# Altium PCB MTCH9010_Evaluation_Kit.PcbDoc (part 2 of 2)
Units mm, origin at the board's own origin, x right, y up, seen from the top; angles counter-clockwise.
Board outline 60 x 70 mm, 4 copper layers (Top Layer, Gnd Plane 1, Gnd Plane 2, Bottom Layer), stack 1.574 mm thick; 87 components, 67 nets, 337 pads, 182 vias.
Unrouted connection lines stored in the file: 1.
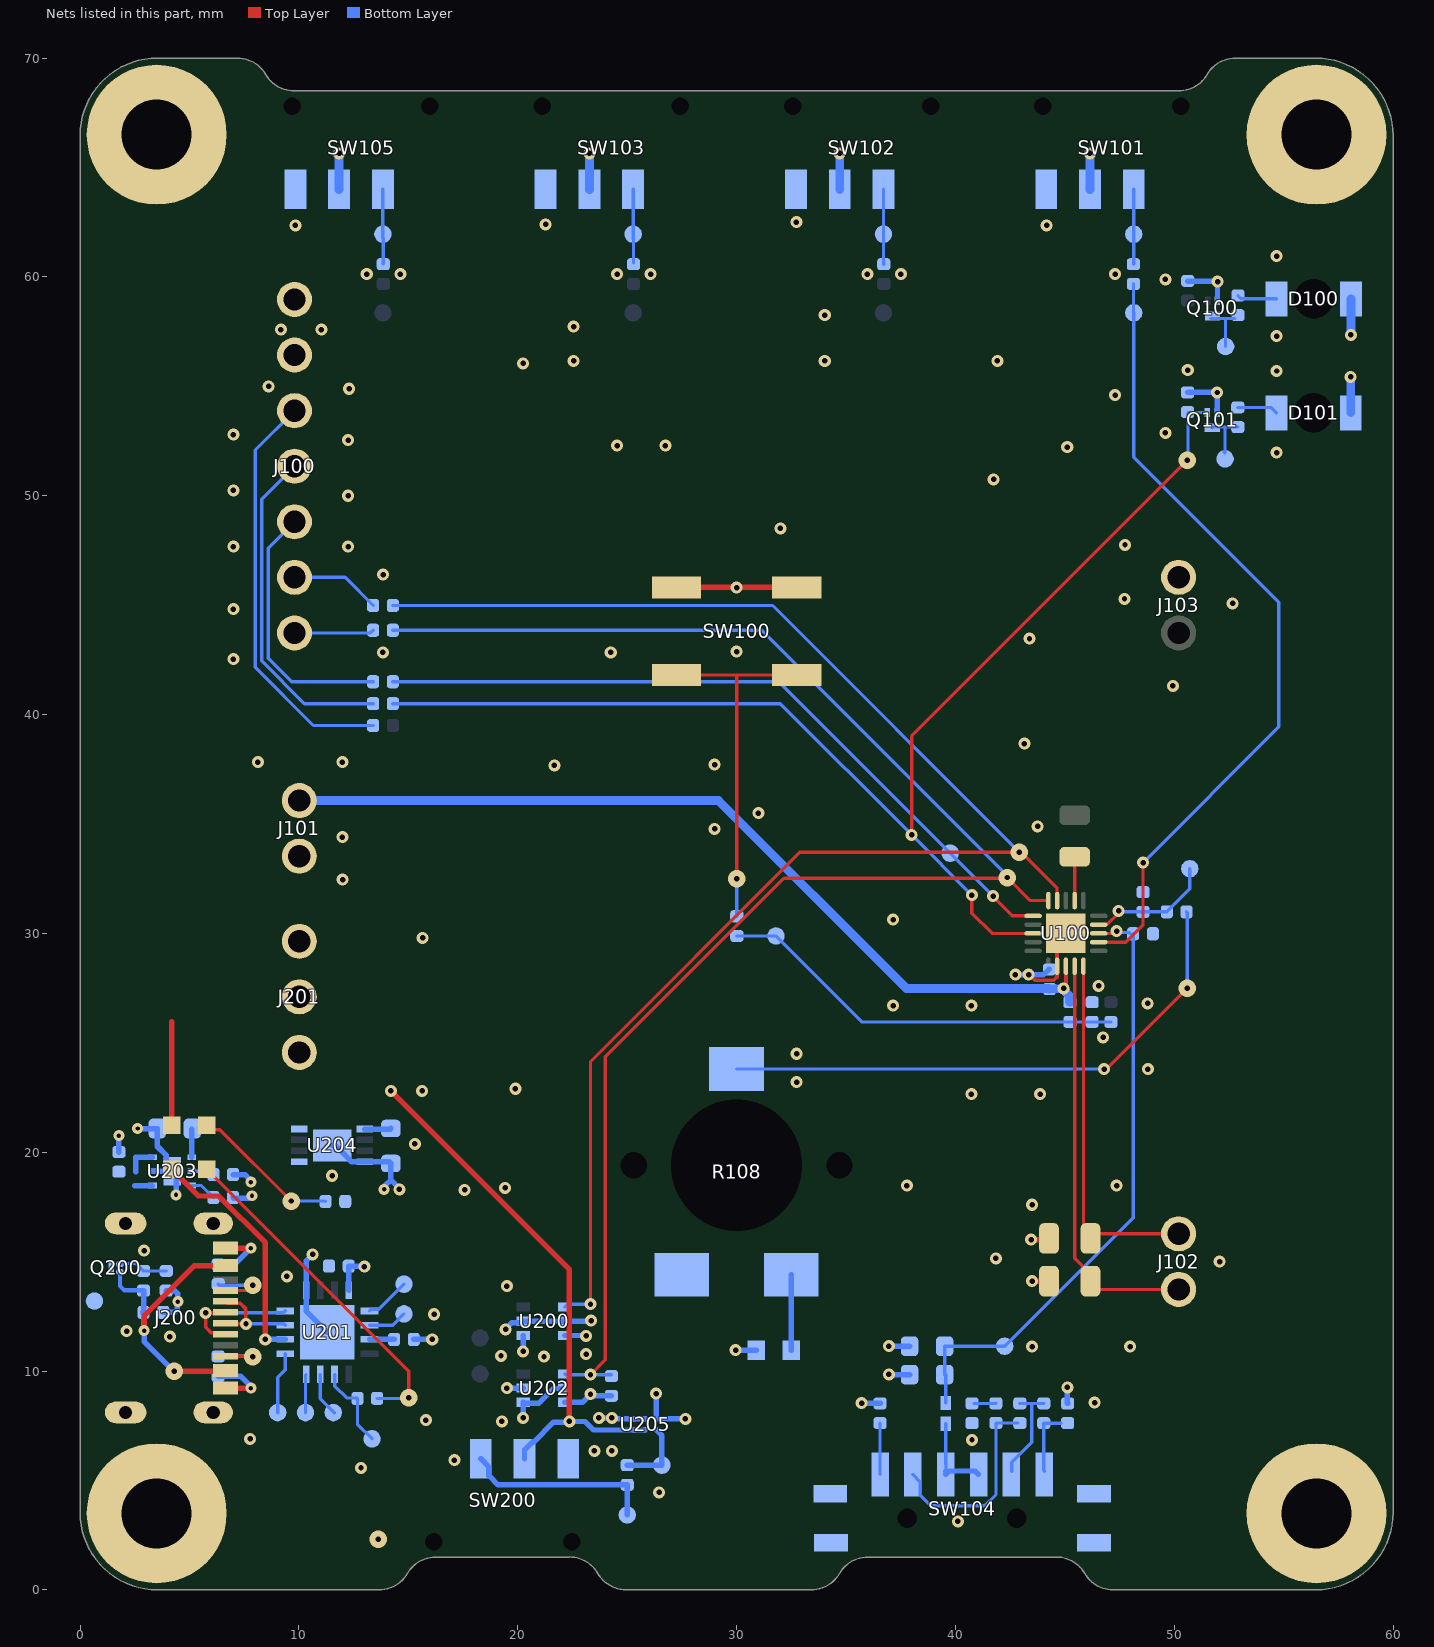
[diagram p4: the nets of this part, all layers, seen from the top]

## Via types
v1: diameter 0.55, hole 0.25, Top Layer to Bottom Layer, 159 vias
v2: diameter 0.55/0.8 (per signal layer), hole 0.25, Top Layer to Bottom Layer, 13 vias
v3: diameter 0.5, hole 0.2, Top Layer to Bottom Layer, 10 vias

## Nets (pads, with @x,y where several pads share a name; then routed paths per layer and width w, separated by ;. In a path a pad name is that pad's centre, name@x,y a point inside that pad or via, vN(x,y) a via of type N, cw(c..) or ccw(c..) an arc to the next point about the centre after c; other vN are vias at no path point) (continued)
GND: C100.2 C101.1 C102.1 C103.2 C200.2 C202.1 C203.1 C204.1 C205.1 J100.6 J103.1 J200.1 J200.2 J200.3 J200.4 J200.A1/B12 J200.B1/A12 pad.666 Q100.2 Q101.2 R103.1 R104.1 R108.3 R120.1 R123.1 R126.2 R202.2 R203.2 R204.1 R205.1 R206.2 R207.2 SW100.1 SW100.2 SW101.3 SW102.3 SW103.3 SW104.7 SW105.3 SW200.3 U100.17 U100.21 U200.2 U200.5 U201.13 U201.17 U202.2 U203.5 U203.7 U204.4 U204.9 U205.C1 | length 49
  Top Layer w0.18: v1(43.35,28.115) 43.385,28.115 43.64,27.86 44.495,27.86 44.65,28.015 44.65,29.6 U100.21@45.05,30
  Top Layer w0.25: J200.B1/A12@6.657,9.22 v3(7.8,9.22) ; J200.A1/B12@6.657,15.62 v3(7.8,15.62) ; SW100.1@27.25,45.809 29.991,45.809 v1(30,45.8) 30.009,45.809 SW100.2@32.75,45.809
  Bottom Layer w0.24: v1(26.325,8.971) 26.333,8.963 U205.C1@26.333,7.818 v1(27.662,7.818) ; Q101.2@51.964,53.901 v1(51.964,54.718) ; Q100.2@51.978,58.972 v1(51.978,59.789)
  Bottom Layer w0.25: C204.1@1.773,20.009 v3(1.773,20.759) ; v3(2.63,21.082) C202.1@3.526,21.082 3.526,20.273 3.929,19.87 3.929,19.401 U203.7@4.204,19.126 ; U203.5@3.304,19.126 U203.7@4.204,19.126 ; R206.2@3.8,12.683 4.322,12.683 4.447,12.808 4.447,13.148 v3(4.469,13.17) 4.456,13.183 4.456,13.541 4.322,13.675 R207.2@3.937,13.675 ; v3(4.383,18.05) 4.383,18.947 U203.7@4.204,19.126 ; R202.2@6.311,9.77 7.328,9.77 7.675,9.423 7.675,9.413 7.8,9.288 v3(7.8,9.22) ; R203.2@6.311,14.87 7.05,14.87 v3(7.8,15.62) ; R205.1@6.99,17.933 7.023,17.9 7.677,17.9 7.787,18.01 v3(7.855,18.01) ; C205.1@6.99,18.982 7.001,18.972 7.538,18.972 7.752,18.758 7.752,18.682 v3(7.8,18.634) ; v1(10.626,15.33) 10.621,15.33 10.325,15.034 U201.13@10.325,13.695 10.325,12.745 10.65,12.42 U201.17@11.3,11.77 ; U204.9@11.517,20.311 11.667,20.311 12.267,19.711 12.267,19.707 12.413,19.561 U204.4@13.017,19.561 14.125,19.561 C203.1@14.2,19.486 14.2,18.734 ; v3(13.891,18.3) 13.939,18.348 13.939,18.473 14.2,18.734 ; v1(14.591,18.3) 14.591,18.342 14.2,18.734 ; v1(19.45,11.902) 19.45,11.915 19.746,12.212 20.179,12.212 20.25,12.283 23.326,12.283 v1(23.35,12.307) ; v1(19.5,9.22) U202.2@20.25,9.22 ; v1@35.713,8.521 R126.2@36.556,8.521 ; v1(36.956,9.845) 36.967,9.834 R120.1@37.908,9.834 ; v1(42.736,28.113) 42.738,28.114 v1(43.35,28.115) v1(43.35,28.115) 44.024,28.115 44.268,28.36 C100.2@44.3,28.36 ; R104.1@50.611,54.722 51.959,54.722 v1(51.964,54.718) ; R103.1@50.625,59.794 v1@51.974,59.794
  other v1: 40.116,3.133 26.458,4.457 12.837,5.571 17.1,5.925 23.504,6.349 24.3,6.349 40.758,6.857 7.769,6.904 19.275,7.701 15.8,7.757 35.713,8.532 46.364,8.557 21.2,10.661 19.235,10.69 23.121,10.775 43.51,11.113 47.987,11.113 4.1,11.574 2.129,11.829 16.173,12.595 19.5,13.878 9.451,14.33 52.077,15 41.851,15.15 2.926,15.504 43.51,17.6 17.575,18.279 19.421,18.376 37.781,18.473 47.368,18.473 11.517,18.925 15.297,20.386 40.727,22.66 43.873,22.66 15.627,22.803 19.892,22.9 32.743,23.2 48.791,23.8 32.743,24.5 46.75,25.25 37.156,26.7 40.727,26.7 48.782,26.8 46.55,27.598 15.65,29.793 37.156,30.632 12,32.462 11.985,34.4 28.996,34.774 43.76,34.893 31,35.497 21.675,37.679 28.996,37.716 8.127,37.829 11.985,37.829 43.152,38.668 49.936,41.309 7,42.534 13.837,42.842 24.25,42.842 30,42.879 43.387,43.469 7,44.823 52.671,45.084 47.727,45.292 13.852,46.394 7,47.671 12.25,47.671 47.75,47.75 32.002,48.509 12.25,50 7,50.25 41.75,50.75 54.676,51.972 45.111,52.227 24.537,52.289 26.75,52.289 12.25,52.54 7,52.79 49.591,52.871 47.3,54.595 12.298,54.89 8.617,55 54.676,55.7 50.618,55.737 20.25,56.047 22.554,56.166 34.03,56.166 41.921,56.166 54.676,57.296 9.177,57.593 11.027,57.593 22.554,57.728 34.03,58.25 49.591,59.888 13.099,60.132 14.637,60.132 24.537,60.132 26.074,60.132 35.974,60.132 37.512,60.132 47.3,60.132 54.676,60.948 9.837,62.352 44.166,62.352 21.275,62.4 32.729,62.5
HEARTBEAT: Q101.1 R104.2 R128.2 U100.13 | length 59.2
  Top Layer w0.15: v1(38,34.5) 38,39.025 v2(50.602,51.628) ; v1(40.75,31.748) 40.75,30.925 41.675,30 U100.13@43.55,30
  Bottom Layer w0.15: R128.2@14.292,40.5 32,40.5 v1(38,34.5) 38,34.498 v1(40.75,31.748) ; v2@50.629,51.914 50.629,53.804 Q101.1@51.514,53.804
MTCH9010_RX: R107.2 R124.1 U100.10 U202.4 | length 73.8
  Top Layer w0.15: v1(23.325,9.834) 24,10.509 24,24.36 32.165,32.525 42.346,32.525 v2(42.375,32.554) 43.429,31.5 U100.10@44.25,31.5
  Bottom Layer w0.15: R107.2@14.292,43.854 31.146,43.854 42.375,32.625 v2(42.375,32.554) ; U202.4@22.15,9.87 22.186,9.834 v1(23.325,9.834) R124.1@24.282,9.834
MTCH9010_TX: R106.2 U100.9 U200.4 | length 72.3
  Top Layer w0.15: v1(23.325,13.06) 23.325,24.144 32.886,33.705 43.016,33.705 44.64,32.08 44.64,31.51 U100.9@44.65,31.5
  Bottom Layer w0.15: R106.2@14.292,44.985 31.644,44.985 v2(42.924,33.705) v2@42.924,33.826 ; U200.4@22.15,12.925 22.275,13.05 v1@23.315,13.05
NetC201_1: C201.1 Q200.1 R207.1 | length 2.2
  Bottom Layer w0.15: Q200.1@1.846,14.912 2.554,14.912 C201.1@2.892,14.575 ; C201.1@2.9,14.575 3.363,14.575 R207.1@3.937,14.575
NetC205_2: C205.2 U203.2 | length 1
  Bottom Layer w0.15: U203.2@5.104,19.126 5.947,19.126 C205.2@6.09,18.982
NetD100_2: D100.2 R100.2 | length 1.8
  Bottom Layer w0.15: R100.2@52.913,59.15 53.063,59 D100.2@54.673,59
NetD101_2: D101.2 R101.2 | length 1.9
  Bottom Layer w0.15: R101.2@52.906,54.038 54.416,54.038 D101.2@54.666,53.788
NetD200_2: D200.2 R201.1 | length 15.7
  Top Layer w0.15: D200.2@5.778,19.226 6.103,18.901 15.015,9.989 v2(15.015,8.78)
  Bottom Layer w0.15: R201.1@13.575,8.75 14.985,8.75 v2(15.015,8.78)
NetD201_2: D201.2 R204.2 | length 6.9
  Top Layer w0.15: D201.2@5.778,21.226 5.971,21.033 6.379,21.033 v2(9.642,17.77)
  Bottom Layer w0.15: v2(9.642,17.77) 11.196,17.77 R204.2@11.217,17.75
NetJ100_1: J100.1 R107.1 | length 3.7
  Bottom Layer w0.15: J100.1@9.8,43.73 13.268,43.73 R107.1@13.392,43.854 ; J100.1@10.096,43.466 J100.1@10.134,43.428
NetJ100_2: J100.2 R106.1 | length 4.1
  Bottom Layer w0.15: J100.2@9.8,46.27 12.107,46.27 R106.1@13.392,44.985
NetJ100_3: J100.3 R129.1 | length 12
  Bottom Layer w0.15: J100.3@9.8,48.81 8.6,47.61 8.6,42.574 9.674,41.5 R129.1@13.392,41.5
NetJ100_4: J100.4 R128.1 | length 15.4
  Bottom Layer w0.15: J100.4@9.8,51.35 8.3,49.85 8.3,42.45 10.25,40.5 R128.1@13.392,40.5
NetJ100_5: J100.5 R127.1 | length 19
  Bottom Layer w0.15: J100.5@9.8,53.89 8,52.09 8,42.163 10.662,39.5 R127.1@13.391,39.5
NetJ104_2: J104.2 SW104.3 SW104.4 | length 3.8
  Bottom Layer w0.15: SW104.4@39.558,5.76 J104.2@39.558,7.596 ; SW104.4@39.569,5.422 SW104.4@39.569,5.76
  Bottom Layer w0.25: SW104.4@39.556,5.276 39.712,5.433 40.899,5.433 SW104.3@41.056,5.276 ; SW104.4@39.558,5.422 SW104.4@39.569,5.422
NetJ105_1: J105.1 R108.1 | length 3.4
  Bottom Layer w0.25: J105.1@32.5,10.954 R108.1@32.5,14.403
NetJ200_A5: J200.A5 R203.1 | length 3
  Top Layer w0.15: J200.A5@6.647,13.68 7.594,13.68 7.838,13.925 v2(7.881,13.925)
  Bottom Layer w0.15: R203.1@6.311,13.97 6.356,13.925 v2(7.881,13.925) ; v2@7.836,13.67 v2@7.881,13.625
NetJ200_B5: J200.B5 R202.1 | length 2.7
  Top Layer w0.15: J200.B5@6.657,10.67 v2@7.8,10.67
  Bottom Layer w0.15: R202.1@6.311,10.69 v2@7.836,10.69
  other v2: 7.881,10.645
NetQ100_3: pad.5@52.348,56.819 Q100.3 R100.1 | length 2.4
  Bottom Layer w0.15: Q100.3@51.673,58.1 R100.1@52.773,58.1 ; pad.5@52.346,56.819 52.346,58.089
NetQ101_3: pad.5@52.324,51.688 Q101.3 R101.1 | length 2.4
  Bottom Layer w0.15: Q101.3@51.739,53.104 51.772,53.138 52.324,53.138 ; pad.5@52.309,51.963 52.29,51.982 52.29,52.013 52.324,52.046 52.324,53.138 ; R101.1@52.906,53.138 52.324,53.138
NetR105_2: pad.5@48.15,61.952 R105.2 SW101.1 | length 3.4
  Bottom Layer w0.15: R105.2@48.135,60.582 48.15,60.597 pad.5@48.15,61.952 SW101.1@48.15,64
NetR108_2: R108.2 R109.2 | length 25.6
  Top Layer w0.15: v1(46.8,23.8) 46.9,23.8 50.588,27.488 v2(50.6,27.488)
  Bottom Layer w0.15: R108.2@30,23.803 46.797,23.803 v1(46.8,23.8) ; R109.2@50.56,30.985 50.6,30.945 v2(50.6,27.488)
NetR110_2: R110.2 SW100.3 SW100.4 | length 16.5
  Top Layer w0.15: SW100.3@27.25,41.809 30.009,41.809 ; v2@30.009,32.49 30.009,41.809 ; SW100.4@32.75,41.809 30.009,41.809
  Bottom Layer w0.15: R110.2@30.01,30.783 v2(30.01,32.49)
NetR114_2: pad.5@36.712,61.952 R114.2 SW102.1 | length 3.4
  Bottom Layer w0.15: pad.5@36.712,61.586 36.712,60.647 36.727,60.632 R114.2@36.727,60.582 ; pad.5@36.712,61.586 SW102.1@36.712,64
NetR116_2: pad.5@25.274,61.952 R116.2 SW103.1 | length 3.4
  Bottom Layer w0.15: pad.5@25.274,61.724 25.29,61.709 R116.2@25.29,60.632 ; pad.5@25.275,61.725 SW103.1@25.275,64
NetR121_1: R121.1 R123.2 | length 1
  Bottom Layer w0.15: R123.2@40.858,8.521 41.855,8.521 R121.1@41.858,8.524
NetR122_2: pad.5@13.837,61.952 R122.2 SW105.1 | length 3.4
  Bottom Layer w0.15: SW105.1@13.837,64 pad.5@13.837,61.952 13.837,61.786 13.852,61.77 R122.2@13.852,60.6
NetR126_1: R126.1 SW104.6 | length 2.3
  Bottom Layer w0.15: SW104.6@36.556,5.276 R126.1@36.556,7.621
NetR200_1: R200.1 U201.3 | length 1.1
  Bottom Layer w0.25: U201.3@13.225,11.445 R200.1@14.35,11.445
NetR201_2: pad.5@13.34,6.904 R201.2 U201.6 | length 3.9
  Bottom Layer w0.15: U201.6@11.625,9.845 11.638,9.832 11.638,9.308 12.175,8.771 12.654,8.771 R201.2@12.675,8.75 12.675,7.57 pad.5@13.34,6.904
NetR205_2: R205.2 U203.3 | length 1.2
  Bottom Layer w0.15: U203.3@5.104,18.476 5.547,18.476 R205.2@6.09,17.933
NetR208_1: pad.5@25.004,3.425 R208.1 SW200.1 | length 8.8
  Bottom Layer w0.25: SW200.1@18.309,5.993 18.684,5.618 18.684,5.216 19.1,4.8 R208.1@25.004,4.8 pad.5@25.004,3.425
NetR208_2: pad.5@26.584,5.7 R208.2 U205.C2 | length 3.3
  Bottom Layer w0.24: R208.2@25.004,5.7 pad.5@26.584,5.7 26.584,7.058 U205.C2@26.333,7.31
NetTP200_1: TP200.1 U201.8 | length 1.8
  Bottom Layer w0.15: TP200.1@10.3,8.1 10.3,9.82 U201.8@10.325,9.845
NetTP201_1: TP201.1 U201.9 | length 2.8
  Bottom Layer w0.15: TP201.1@9.03,8.1 9.03,9.709 9.375,10.054 U201.9@9.375,10.795
NetTP202_1: TP202.1 U201.1 | length 2.1
  Bottom Layer w0.15: U201.1@13.225,12.745 13.3,12.82 13.65,12.82 TP202.1@14.8,13.97
NetTP203_1: TP203.1 U201.2 | length 1.8
  Bottom Layer w0.15: U201.2@13.225,12.095 14.283,12.095 TP203.1@14.8,12.612
NetTP204_1: TP204.1 U201.7 | length 2
  Bottom Layer w0.15: U201.7@10.975,9.845 10.975,8.742 TP204.1@11.617,8.1
OPERATION_MODE: pad.5@48.15,58.362 R105.1 U100.2 | length 37
  Top Layer w0.15: U100.2@46.55,29.6 47.783,29.6 48.575,30.392 v1(48.575,33.233)
  Bottom Layer w0.15: pad.5@48.135,58.362 R105.1@48.135,59.682 ; pad.5@48.15,58.362 48.15,51.768 54.777,45.141 54.777,39.435 v1(48.575,33.233)
RESET: C103.1 pad.5@31.796,29.883 R102.2 R110.1 R125.1 | length 18.7
  Bottom Layer w0.15: R110.1@30.01,29.883 pad.5@31.796,29.883 35.724,25.955 R125.1@45.231,25.955 C103.1@46.25,25.955 R102.2@47.106,25.955
SENSE_CAP: R113.1 U100.7 | length 1.9
  Top Layer w0.15: U100.7@45.45,31.5 R113.1@45.45,33.45
SENSE_CON1: J102.1 R111.1 U100.20 | length 16.7
  Top Layer w0.15: U100.20@45.85,28.5 45.85,16.717 46.175,16.392 R111.1@46.175,16.061 46.384,16.27 J102.1@50.2,16.27
SENSE_CON2: J102.2 R112.1 U100.19 | length 19.4
  Top Layer w0.15: U100.19@45.45,28.5 45.45,15.15 46.175,14.425 R112.1@46.175,14.107 ; J102.2@50.2,13.73 R112.1@46.539,13.73 ; R112.1@46.175,14.094 R112.1@46.175,14.107 ; R112.1@46.175,14.094 R112.1@46.539,13.73 ; R112.1@46.175,14.094 R112.1@46.539,13.73 ; R112.1@46.175,14.094 R112.1@46.175,14.107
SLEEP_2S: R119.2 R121.2 SW104.5 | length 9.2
  Bottom Layer w0.15: SW104.5@38.056,5.276 38.381,4.951 38.381,4.343 38.883,3.84 41.338,3.84 41.855,4.357 41.855,7.621 R119.2@42.858,7.621
SLEEP_16S: R117.2 R119.1 SW104.2 | length 4.6
  Bottom Layer w0.15: SW104.2@42.569,5.422 42.569,5.822 43.489,6.742 43.489,8.521 ; R119.1@42.943,8.521 43.489,8.521 ; R117.2@44.036,8.521 43.489,8.521
SLEEP_128S: R115.1 R117.1 SW104.1 | length 3
  Bottom Layer w0.15: SW104.1@44.069,5.422 44.036,5.455 R117.1@44.036,7.621 R115.1@44.829,7.621
SLEEP_CONFIG: C102.2 J104.1 pad.5@42.252,11.134 R118.1 R120.2 U100.3 | length 28.1
  Top Layer w0.15: U100.3@46.55,30 47.16,30 47.26,30.1 v1(47.368,30.1)
  Bottom Layer w0.15: R120.2@39.508,9.834 R118.1@39.508,11.134 pad.5@42.252,11.134 48.125,17.007 C102.2@48.125,29.985 ; J104.1@39.558,8.546 R120.2@39.558,9.834 ; v1(47.368,30.1) 47.425,30.043 47.93,30.043 47.975,29.997 C102.2@47.975,29.985
THRESHOLD: C101.2 pad.5@50.71,32.955 R109.1 U100.4 | length 5.9
  Top Layer w0.15: U100.4@46.55,30.4 46.56,30.41 46.94,30.41 47.463,30.933 v1(47.463,31.028)
  Bottom Layer w0.15: v1(47.463,31.028) 47.506,30.985 R109.1@49.66,30.985 50.71,32.035 pad.5@50.71,32.969
USB_N: J200.A7 J200.B7 U201.11 | length 4.5
  Top Layer w0.16: J200.A7@6.657,12.17 6.665,12.162 7.573,12.162 v1(7.581,12.154) ; J200.B7@6.657,13.17 6.727,13.1 7.315,13.1 7.581,12.834 7.581,12.181 v1@7.575,12.176
  Bottom Layer w0.16: v1(7.581,12.154) 9.316,12.154 U201.11@9.375,12.095
USB_P: J200.A6 J200.B6 U201.12 | length 6.3
  Top Layer w0.16: J200.B6@6.657,11.67 6.587,11.74 6,11.74 5.734,12.006 v1(5.734,12.659) 5.739,12.664 6.652,12.664 J200.A6@6.657,12.67
  Bottom Layer w0.16: v1(5.734,12.659) 9.289,12.659 U201.12@9.375,12.745
VBUS: C201.2 J200.A4/B9 J200.B4/A9 Q200.2 R206.1 | length 13.8
  Top Layer w0.25: v3@2.926,11.82 v3(2.926,11.85) 2.926,12.521 5.225,14.82 J200.A4/B9@6.657,14.82 ; v2@4.268,10 6.637,10 J200.B4/A9@6.657,10.02
  Bottom Layer w0.2: Q200.2@1.821,14.475 1.821,13.888 2.024,13.686 2.889,13.686 C201.2@2.9,13.675
  Bottom Layer w0.25: R206.1@2.854,12.683 2.926,12.612 v3(2.926,11.85) 2.926,11.343 v2@4.268,10 ; R206.1@2.9,12.683 C201.2@2.9,13.675
  other v2: 4.3,10
VBUS_DELAYED: C204.2 pad.5@0.655,13.2 Q200.3 U203.4 U203.6 | length 2.2
  Bottom Layer w0.25: 2.494,18.476 U203.4@3.304,18.476 ; 2.547,19.097 2.547,19.776 U203.6@3.304,19.776
VCC_BRIDGE: C200.1 D200.1 R200.2 U200.1 U201.10 U201.16 U202.1 U202.5 U205.A1 U205.B1 | length 19.5
  Top Layer w0.25: D200.1@4.178,19.226 5.404,18 6.328,18 8.461,15.867 v1(8.461,11.445)
  Bottom Layer w0.24: v1(23.709,7.86) v1(24.3,7.86) ; v1@24.3,7.843 24.325,7.818 U205.A1@25.317,7.818 U205.B1@25.825,7.818
  Bottom Layer w0.25: v1(8.461,11.445) U201.10@9.375,11.445 ; U201.16@12.275,13.695 C200.1@12.275,14.795 12.285,14.785 12.984,14.785 v1(12.994,14.776) ; R200.2@15.25,11.445 v1(16.093,11.445) ; v1(20.25,7.857) U202.1@20.25,8.57 20.295,8.525 20.95,8.525 21.627,9.202 22.132,9.202 U202.5@22.15,9.22 ; v1(20.25,10.9) U200.1@20.25,11.625
  other v2: 13.632,2.318
VCC_MTCH9010: C100.1 J101.1 R125.2 U100.18 | length 40.1
  Top Layer w0.18: v1@45.05,27.688 U100.18@45.05,28.5
  Bottom Layer w0.4: J101.1@10.017,36.07 29.17,36.07 37.752,27.488 44.272,27.488 C100.1@44.3,27.46 44.314,27.474 44.936,27.474 v1(44.95,27.488) 44.95,27.447 45.025,27.372 45.025,27.331 45.2,27.156 45.2,26.886 R125.2@45.231,26.855
VCC_P3V3: C203.2 J201.1 SW200.2 U204.1 U205.A2 U205.B2 | length 26.3
  Top Layer w0.25: v1(14.2,22.8) 22.36,14.64 v1(22.358,7.7) v1(22.358,7.7)
  Bottom Layer w0.24: v1(22.358,7.7) 23.069,7.7 23.459,7.31 U205.A2@25.317,7.31 U205.B2@25.825,7.31
  Bottom Layer w0.25: U204.1@13.017,21.061 14.175,21.061 C203.2@14.2,21.086 ; SW200.2@20.309,5.993 20.309,6.393 20.684,6.768 20.744,6.768 21.637,7.662 22.32,7.662 v1(22.358,7.7)
VCC_P5V0: C202.2 J201.3 U203.1 U204.5 U204.8 | length 1.3
  Bottom Layer w0.25: U203.1@5.104,19.776 C202.2@5.104,21.061
VCC_SYSTEM: D100.1 D101.1 D201.1 J100.7 J101.2 J105.2 J201.2 R111.2 R112.2 R115.2 R118.2 R124.2 SW101.2 SW102.2 SW103.2 SW105.2 U200.6 U202.6 | length 22.1
  Top Layer w0.25: D201.1@4.178,21.226 4.178,25.957 ; J201.2@10.017,27.065 J201.2@10.017,27.1 ; v1(43.458,16.009) R111.2@44.223,16.009 ; v1(43.51,14.107) R112.2@44.275,14.107
  Bottom Layer w0.25: U202.6@22.15,8.57 22.953,8.57 v1(23.325,8.942) 23.406,8.942 23.479,8.87 R124.2@24.282,8.87 ; U200.6@22.15,11.625 23.102,11.625 v1(23.12,11.607) ; v1(29.956,10.954) J105.2@30.9,10.954 ; v1@36.956,11.145 36.967,11.134 R118.2@37.908,11.134 ; v1(45.121,9.255) 45.121,8.529 R115.2@45.129,8.521
  Bottom Layer w0.4: SW105.2@11.837,64 v1(11.837,65.648) ; SW103.2@23.275,64 v1(23.275,65.648) ; SW102.2@34.712,64 v1(34.712,65.648) ; SW101.2@46.15,64 v1(46.15,65.648) ; D101.1@58.066,53.788 v1(58.066,55.435) ; v1(58.073,57.352) D100.1@58.073,59
  other v1: 36.961,11.139
WAKE-UP: pad.5@39.76,33.667 R129.2 U100.11 | length 33.7
  Top Layer w0.15: v1(41.719,31.707) 41.719,31.684 42.594,30.81 43.54,30.81 U100.11@43.55,30.8
  Bottom Layer w0.15: R129.2@14.292,41.5 31.927,41.5 v1(41.719,31.707)
pads on no net: D100.0 D101.0 J100.0 J101.0 J102.0 J103.0 J200.0 J200.A8 J200.B8 J201.0 Q100.0 Q101.0 Q200.0 R108.MH SW101.6 SW101.7 SW102.6 SW102.7 SW103.6 SW103.7 SW104.MH SW105.6 SW105.7 SW200.6 SW200.7 U100.0 U100.8 U100.14 U100.16 U201.14 U201.15 U203.0 U204.2 U204.3 U204.6 U204.7

## Polygon pours and split planes (outlines as drawn)
VCC_P5V0 on Bottom Layer "VCC_P5V0_L04_P006" (solid, remove dead copper, pour order 6): 0.245,19.561 8.101,19.561 8.7,18.961 10.5,18.961 10.5,21.611 11.387,21.611 11.387,25.525 0.245,25.525
VBUS_DELAYED on Bottom Layer "VBUS_DELAYED_L04_P005" (solid, remove dead copper, pour order 5): 1.553,12.672 -0.009,12.672 -0.009,19.384 3.504,19.384 3.504,18.346 1.2,18.346 1.2,16 1.28,15.92 1.553,15.92
VCC_P3V3 on Bottom Layer "VCC_P3V3_L04_P007" (solid, remove dead copper, pour order 7): 14.9,20.544 12.5,20.544 12.5,21.6 12.489,21.611 11.387,21.611 11.387,24.877 11.387,28.475 8.6,28.475 8.6,31 13.802,31 14.9,29.902
GND on Bottom Layer "GND_L04_P013" (solid, remove dead copper, pour order 13): -0.5,70.5 60.5,70.5 60.5,-1 -0.5,-1
VCC_SYSTEM on Top Layer "VCC_SYSTEM_L01_P011" (solid, remove dead copper, pour order 11): 11.334,25.7 11.334,34.75 4.009,34.75 4.009,52.341 15.668,64 52.765,64 57.5,59.265 57.5,54.595 60,54.595 60,70.5 -0.5,70.5 -0.5,25.7
GND on Top Layer "GND_L01_P012" (solid, remove dead copper, pour order 12): -1,70 61,70 61,-1 -1,-1
no net on Gnd Plane 2 (split plane): 48.582,43.693
GND on Gnd Plane 2 (split plane): 228 vertices, not listed, extent 0.509,0.509 59.491,69.491
VCC_BRIDGE on Gnd Plane 2 (split plane): 10.225,15.321 21.071,15.321 21.071,13.55 21.071,8.4 21.08,8.35 21.108,8.308 21.15,8.28 21.2,8.271 26.871,8.271 26.871,0.51 25.009,0.51 24.992,0.513 24.975,0.513 24.958,0.515 24.958,0.512 24.828,0.521 24.701,0.546 24.578,0.588 24.462,0.645 24.354,0.717 24.257,0.803 24.171,0.9 24.099,1.008 24.083,1.038 24.076,1.046 24.031,1.121 23.914,1.279 23.781,1.426 23.635,1.558 23.477,1.676 23.307,1.777 23.129,1.861 22.943,1.928 22.752,1.976 22.557,2.005 22.397,2.013 22.391,2.014 22.384,2.013 22.36,2.014 22.36,2.015 22.326,2.011 22.305,2.01 16.258,2.01 16.246,2.01 16.233,2.009 16.061,2.001 15.866,1.972 15.674,1.924 15.489,1.857 15.31,1.773 15.141,1.672 14.983,1.554 14.836,1.422 14.704,1.275 14.586,1.117 14.542,1.042 14.535,1.034 14.519,1.004 14.447,0.896 14.361,0.799 14.264,0.713 14.156,0.641 14.039,0.584 13.917,0.542 13.789,0.517 13.672,0.509 13.66,0.51 13.646,0.509 12.966,0.509 12.966,5.388 12.957,5.438 12.928,5.48 8.179,10.229 8.179,13.296 10.207,15.324
VCC_SYSTEM on Gnd Plane 2 (split plane): 22.621,12.307 22.63,12.257 22.658,12.215 22.7,12.187 22.75,12.177 42.736,12.177 42.786,12.187 42.828,12.215 42.856,12.257 42.866,12.307 42.866,17.121 44.871,17.121 44.871,11.403 44.871,10.644 44.88,10.594 44.908,10.552 45.779,9.682 45.779,1.633 45.726,1.672 45.557,1.773 45.378,1.857 45.193,1.924 45.001,1.972 44.806,2.001 44.609,2.01 44.609,2.011 44.608,2.01 36.006,2.011 36.005,2.011 36.004,2.011 35.807,2.001 35.612,1.972 35.421,1.924 35.235,1.858 35.057,1.773 34.887,1.672 34.729,1.555 34.583,1.422 34.45,1.276 34.333,1.117 34.288,1.043 34.281,1.034 34.265,1.005 34.193,0.897 34.107,0.799 34.01,0.714 33.902,0.642 33.786,0.584 33.663,0.543 33.536,0.517 33.412,0.509 33.406,0.51 33.406,0.511 33.401,0.51 33.4,0.51 27.129,0.51 27.129,8.4 27.12,8.45 27.092,8.492 27.05,8.52 27,8.529 21.329,8.529 21.329,13.55 21.329,32.25 21.32,32.3 21.292,32.342 21.25,32.37 21.2,32.379 8.591,32.379 8.591,34.621 22.621,34.621
GND on Gnd Plane 1 (split plane): 48.582,43.693
GND on Gnd Plane 1 (split plane): 287 vertices, not listed, extent 0.509,0.509 59.491,69.491

## Keep-outs
Bottom Layer:
  rectangle: 30.5,10.504 32.9,11.404
  rectangle: 25.211,7.185 26.458,7.943
Keep-Out Layer:
  text "'.Layer_Name'" at 174.01,-104.74 h1.5

## Other copper
Top Layer:
  text ".ProjectPCBFabRevision" at 209.188,-104.562 h1.5
  text "'.Layer_Name'" at 174.01,-104.74 h1.5
Bottom Layer:
  text ".ProjectPCBFabRevision" at 209.188,-104.562 h1.5
  text ".ProjectPCBFabRevision" at 209.188,-104.562 h1.5
  text ".ProjectPCBFabRevision" at 209.188,-104.562 h1.5
  text "'.Layer_Name'" at 174.01,-104.74 h1.5
Gnd Plane 1 (plane layer: these items are gaps in the copper):
  pour cut-out: 45.237,31.286 45.646,31.286 ccw(c45.646,32.556) 46.916,32.556 46.916,35.891 ccw(c46.282,35.934) 46.326,36.568 46.326,38.871 49.65,42.25 ccw(c50.182,43.76) 48.582,43.693 44.579,39.69 44.578,36.568 ccw(c44.614,35.922) 43.967,35.886 43.967,32.556 ccw(c45.237,32.556)
Gnd Plane 2 (plane layer: these items are gaps in the copper):
  pour cut-out: 45.237,31.286 45.646,31.286 ccw(c45.646,32.556) 46.916,32.556 46.916,35.891 ccw(c46.282,35.934) 46.326,36.568 46.326,38.871 49.65,42.25 ccw(c50.182,43.76) 48.582,43.693 44.579,39.69 44.578,36.568 ccw(c44.614,35.922) 43.967,35.886 43.967,32.556 ccw(c45.237,32.556)
  lines w0.254: 10.175,15.475 8.05,13.35 8.05,10.175 12.837,5.388 12.837,0 ; 10.225,15.45 21.2,15.45 ; 27,0 27,8.4 21.2,8.4 21.2,13.55 21.2,32.25 8.461,32.25 8.461,34.75 22.75,34.75 22.75,12.307 42.736,12.307 42.736,17.25 45,17.25 45,10.644 ; 45,11.403 45,10.644 ; 45.908,0.75 45.908,9.736 45,10.644

## Silkscreen, mask and mechanical layers (free items; w line width, h text height)
Top Overlay:
  drawing of 165 lines, arcs and shapes, not listed
  text "ON" at 10.004,66.03 h1
  text "OFF" at 13.504,66.03 h1
  text "ON" at 21.442,66.03 h1
  text "OFF" at 24.942,66.03 h1
  text "ON" at 33.045,66.03 h1
  text "OFF" at 36.379,66.03 h1
  text "CON" at 43.817,66.03 h1
  text "CAP" at 47.817,66.03 h1
  text "OUTPUT" at 8.812,62.947 h2.5
  text "LOCK" at 20.275,62.947 h2.5
  text "ECFG" at 31.712,62.947 h2.5
  text "MODE" at 43.15,62.947 h2.5
  text "VDD" at 11.496,58.47 h1
  text "*h" at 23.503,57.284 h5
  text "GND" at 11.496,55.93 h1
  text "DETECT" at 11.496,53.39 h1
  text "HBEAT" at 11.496,50.85 h1
  text "MTCH9010 / EVALUATION KIT" at 21.746,50.483 h3
  text "WAKE" at 11.496,48.31 h1
  text "TX" at 11.496,45.77 h1
  text "GND" at 45.735,45.77 h1
  text "RX" at 11.496,43.23 h1
  text "CAP" at 45.735,43.23 h1
  text "CAP SENSE" at 44.103,39.499 h2.5
  text "I/O" at 3.217,39.384 h2.5
  text "RESET" at 27.68,38.109 h1
  text "MTCH9010" at 18.687,35.57 h1
  text "SYSTEM" at 18.687,33.03 h1
  text "3.3V" at 15.662,30.24 h1
  text "5.0V" at 15.662,25.16 h1
  text "MTCH9010" at 38.55,24.75 h2.5
  text "PWR" at 7.378,20.727 h1
  text "ENUM" at 7.378,18.727 h1
  text "CON SENSE" at 44.103,18.53 h2.5
  text "1" at 48.011,15.77 h1
  text "MIN" at 23.415,14.625 h1
  text "MAX" at 34.093,14.625 h1
  text "2" at 47.844,13.23 h1
  text "THRESHOLD" at 22.9,12.183 h2.5
  text "POWER" at 11.895,11.921 h1
  text "USB BRIDGE" at 11.213,5.13 h2.5
  text "SLEEP PERIOD" at 31.859,5.13 h2.5
  text "ON" at 16.476,3.01 h1
  text "OFF" at 19.976,3.01 h1
  text "WAKE" at 33.29,2.776 h1
  text "2" at 38.656,2.776 h1
  text "16" at 40.456,2.776 h1
  text "128" at 43.656,2.776 h1
  text ".ProjectPCBFabRevision" at 209.188,-104.562 h1.5
  text "'.Layer_Name'" at 174.01,-104.74 h1.5
Bottom Overlay:
  text "DETECT" at 59.198,60.875 h1
  text "VDD" at 8.616,58.47 h1
  text "GND" at 8.616,55.93 h1
  text "'.ProjectPCBFabNumber' Rev'.ProjectPCBFabRevision'" at 36.13,55.506 h2
  text "DETECT" at 8.616,53.39 h1
  text "HBEAT" at 8.616,50.85 h1
  text "HBEAT" at 59.198,50.65 h1
  text "WAKE" at 8.616,48.31 h1
  text "Microchip © 2025" at 37.559,46.565 h2
  text "TX" at 8.616,45.77 h1
  text "GND" at 54.666,45.77 h1
  text "RX" at 8.616,43.23 h1
  text "CAP" at 54.666,43.23 h1
  text "" at 27.426,39.068 h5
  text "1" at 37.17,38.29 h5
  text "MTCH9010" at 8.616,35.57 h1
  text "SYSTEM" at 8.616,33.03 h1
  text "C" at 29.487,32.582 h9.7
  text "4" at 37.559,32.575 h5
  text "3V3" at 8.616,29.14 h1
  text "SYSTEM" at 8.616,26.6 h1
  text "5V0" at 8.616,24.06 h1
  text "MIC2008" at 7.064,22.081 h1
  text "MCP1754" at 15.766,22.081 h1
  text "CON1" at 55.766,15.77 h1
  text "MCP2221A" at 15.049,15.46 h1
  text "GP0" at 17.724,13.59 h0.75
  text "CON2" at 55.766,13.23 h1
  text "GP1" at 17.474,12.232 h0.75
  text "J105" at 33.025,11.72 h0.75
  text "R118" at 37.132,10.759 h0.75
  text "R120" at 37.132,9.459 h0.75
  text "MIC94163" at 34.631,7.1 h1
  text "J104" at 37.875,6.536 h0.75 r270
  text "SCL" at 8.605,5.096 h0.75 r270
  text "SDA" at 9.921,5.096 h0.75 r270
  text "GP3" at 11.237,5.096 h0.75 r270
  text "VCC_BRIDGE" at 14.175,3.188 h0.75
  text ".ProjectPCBFabRevision" at 209.188,-104.562 h1.5
  text "'.Layer_Name'" at 174.01,-104.74 h1.5
Top Paste:
  text ".ProjectPCBFabRevision" at 209.188,-104.562 h1.5
  text "'.Layer_Name'" at 174.01,-104.74 h1.5
Bottom Paste:
  rectangle: 10.199,10.67 11.2,11.67
  rectangle: 10.199,11.87 11.2,12.87
  rectangle: 11.4,10.67 12.4,11.67
  rectangle: 11.399,11.87 12.4,12.87
  text ".ProjectPCBFabRevision" at 209.188,-104.562 h1.5
  text "'.Layer_Name'" at 174.01,-104.74 h1.5
Top Solder:
  text ".ProjectPCBFabRevision" at 209.188,-104.562 h1.5
  text "'.Layer_Name'" at 174.01,-104.74 h1.5
Bottom Solder:
  text ".ProjectPCBFabRevision" at 209.188,-104.562 h1.5
  text "'.Layer_Name'" at 174.01,-104.74 h1.5
NOTES (M1):
  lines w0.1: -2.5,-2.5 62.5,-2.5 62.5,72.5 -2.5,72.5 -2.5,-2.5
  text "'.Layer_Name'" at 192.01,-104.74 h1.5
BOARD (M2):
  lines w0.1: 0,3.54 0,66.51 ; 0,66.46 cw(c3.54,66.46) 3.54,70 ; 0,3.54 ccw(c3.54,3.54) 3.54,0 ; 3.54,-0.001 13.66,-0.001 ; 3.54,70 7.188,70 ; 7.188,70 cw(c7.188,68.5) 8.487,69.25 ccw(c9.786,70) 9.786,68.5 ; 9.787,68.5 50.2,68.5 ; 13.66,0 ccw(c13.66,1.5) 14.959,0.75 cw(c16.258,0) 16.258,1.5 ; 16.246,1.5 22.358,1.5 ; 22.36,1.504 cw(c22.36,0.004) 23.659,0.754 ccw(c24.958,1.504) 24.958,0.004 ; 24.956,0 33.4,0 ; 33.406,0 ccw(c33.406,1.5) 34.705,0.75 cw(c36.004,0) 36.004,1.5 ; 36.006,1.5 44.609,1.5 cw(c44.609,0) 45.908,0.75 ccw(c47.207,1.5) 47.207,0 56.46,0 ; 50.201,68.5 ccw(c50.201,70) 51.5,69.25 cw(c52.799,68.5) 52.799,70 56.46,70 cw(c56.46,66.46) 60,66.46 60,3.54 cw(c56.46,3.54) 56.46,0
  text ".ProjectPCBFabRevision" at 209.188,-104.562 h1.5
  text "'.Layer_Name'" at 174.01,-104.74 h1.5
REF POINTS (M3):
  text "'.Layer_Name'" at 174.01,-104.74 h1.5
FAB (M4):
  text ".ProjectPCBFabRevision" at 209.188,-104.562 h1.5
  text "'.Layer_Name'" at 174.01,-104.74 h1.5
Case (M5):
  text "'.Layer_Name'" at 174.01,-104.74 h1.5
Cover (M6):
  text "'.Layer_Name'" at 174.01,-104.74 h1.5
Terminal Block (M7):
  text "'.Layer_Name'" at 174.01,-104.74 h1.5
Route Tool Path:
  text "'.Layer_Name'" at 174.01,-104.74 h1.5
V-Cut (M9):
  text "'.Layer_Name'" at 174.01,-104.74 h1.5
Bottom Assembly:
  text "'.VariantName'" at -76.44,-88.74 h0.9
  text "ASSEMBLY VARIANT:" at -62.19,-88.74 h0.9
  text "DOCUMENT NUMBER:" at -108.44,-96.99 h1.15
  text "'.ProjectPCBAssyNumber'_ASSY-D" at -108.69,-99.99 h1.38
  text ".ProjectPCBAssyRevision" at -125.368,-104.562 h1.5
  text "'.Layer_Name'" at -90.49,-104.74 h1
Top Assembly:
  text "ASSEMBLY VARIANT:" at 146.01,-88.74 h0.9
  text "'.VariantName'" at 160.26,-88.74 h0.9
  text "DOCUMENT NUMBER:" at 192.26,-96.99 h1.15
  text "'.ProjectPCBAssyNumber'_ASSY-D" at 192.51,-99.99 h1.38
  text ".ProjectPCBAssyRevision" at 209.188,-104.562 h1.5
  text "'.Layer_Name'" at 174.01,-104.74 h1
Bottom 3D Body:
  text "'.Layer_Name'" at 174.01,-104.74 h1.15
Top 3D Body:
  text "'.Layer_Name'" at 174.01,-104.74 h1.2
Bottom Courtyard:
  text ".ProjectPCBFabRevision" at 209.188,-104.562 h1.5
  text "'.Layer_Name'" at 174.01,-104.74 h1
Top Courtyard:
  text ".ProjectPCBFabRevision" at 209.188,-104.562 h1.5
  text "'.Layer_Name'" at 174.01,-104.74 h1.1
TITLE (M16):
  lines w0.1: 145.51,-87.49 227.33,-87.49 ; 197.51,-79.99 197.51,-82.99 227.33,-82.99 ; 216.05,-104.625 216.05,-103.355 ; 216.05,-103.99 226.21,-103.99 ; 216.21,-102.79 216.21,-101.79 ; 216.21,-102.29 226.21,-102.29 ; 218.59,-104.625 218.59,-103.355 ; 221.13,-104.625 221.13,-103.355 ; 221.21,-102.59 221.21,-101.99 ; 223.67,-104.625 223.67,-103.355 ; 226.21,-104.625 226.21,-103.355 ; 226.21,-102.79 226.21,-101.79 ; 227.33,-82.99 227.33,-82.99
  lines w0.127: -148.59,-50.165 -143.51,-50.165 ; -148.59,10.16 -143.51,10.16 ; -148.59,70.485 -143.51,70.485 ; -85.09,-110.49 -85.09,-105.41 ; -85.09,125.73 -85.09,130.81 ; -21.59,-110.49 -21.59,-105.41 ; -21.59,125.73 -21.59,130.81 ; 41.91,-110.49 41.91,-105.41 ; 41.91,125.73 41.91,130.81 ; 77.47,-105.41 113.03,-105.41 ; 105.41,-110.49 105.41,-105.41 ; 105.41,125.73 105.41,130.81 ; 145.51,-105.41 145.51,-79.99 ; 145.51,-100.99 227.33,-100.99 ; 145.51,-94.99 227.33,-94.99 ; 145.51,-88.99 227.33,-88.99 ; 168.91,-110.49 168.91,-105.41 ; 168.91,125.73 168.91,130.81 ; 173.51,-105.41 173.51,-88.99 ; 191.51,-100.99 191.51,-94.99 ; 204.51,-105.41 204.51,-100.99 ; 212.01,-105.41 212.01,-94.99 ; 227.33,-74.93 227.33,-105.41 ; 227.33,-50.165 232.41,-50.165 ; 227.33,10.16 232.41,10.16 ; 227.33,70.485 232.41,70.485 ; 227.33,-105.41 227.33,-79.99 111.51,-79.99 111.51,-105.41 227.33,-105.41 ; 227.33,-105.41 -143.51,-105.41 -143.51,125.73 227.33,125.73 227.33,-105.41 ; -148.59,-110.49 232.41,-110.49 232.41,130.81 -148.59,130.81 -148.59,-110.49
  lines w0.254: 116.83,116.73 116.83,121.23 116.83,125.73 ; 129.33,116.73 129.33,121.23 129.33,125.73 ; 207.83,116.73 207.83,121.23 207.83,125.73 ; 227.33,121.23 105.83,121.23 ; 105.83,121.23 105.83,125.73 227.33,125.73 227.33,116.73 105.83,116.73 105.83,121.23
  text "1" at -117.314,127.508 h1.78
  text "2" at -53.924,127.508 h1.78
  text "3" at 9.305,127.508 h1.78
  text "4" at 72.974,127.508 h1.78
  text "5" at 136.449,127.508 h1.78
  text "6" at 200.076,127.508 h1.78
  text "REV" at 108.33,122.73 h1.52
  text "ECO" at 118.33,122.73 h1.52
  text "Comments" at 164.83,122.23 h1.52
  text "Date" at 212.83,122.23 h1.52
  text "A" at -146.685,98.476 h1.78
  text "A" at 229.235,98.476 h1.78
  text "B" at -146.685,38.024 h1.78
  text "B" at 229.235,38.024 h1.78
  text "C" at -146.685,-22.301 h1.78
  text "C" at 229.235,-22.301 h1.78
  text "PART NUMBER:" at 198.51,-81.99 h1
  text "'.ProjectpartNumber'" at 210.51,-82.24 h1.5
  text "D" at -146.685,-82.499 h1.78
  text "TITLE:" at 146.51,-82.49 h1.14
  text "D" at 229.235,-82.499 h1.78
  text "'.ProjectTitle'" at 146.51,-86.49 h2.5
  text "PCB Layout Contact:" at 146.51,-90.99 h1.15
  text "GERBER FILE:" at 174.51,-90.99 h1.15
  text ".ProjectContactPCB" at 146.51,-93.99 h1.6
  text "'.Plot_File_Name'" at 174.51,-93.99 h1.5
  text "M" at 114.51,-95.99 h15.24
  text "Project Owner:" at 146.51,-96.99 h1.15
  text "PCB NUMBER:" at 174.51,-96.99 h1.15
  text "DATE:" at 213.21,-96.99 h1.14
  text "Microchip Technology Inc." at 113.28,-99.25 h1.78
  text ".ProjectContactOwner" at 146.51,-99.99 h1.6
  text ".ProjectPCBFabNumber" at 174.51,-99.99 h1.6
  text "'.PRINT_DATE'" at 213.21,-99.99 h1.5
  text "2355 W. Chandler Blvd." at 114.51,-101.99 h1.78
  text "LAYER NAME:" at 174.51,-102.49 h1.14
  text "10mm" at 212.51,-102.59 h0.7
  text "PCB FILE NAME:" at 146.51,-102.74 h1.15
  text "REV:" at 205.26,-102.74 h1.14
  text "400mil" at 212.41,-104.29 h0.7
  text "Chandler, AZ  85224" at 115.51,-104.49 h1.78
  text "'.PCB_FILE_NAME_NO_PATH'" at 146.51,-104.74 h1
  text "1" at -117.314,-108.712 h1.78
  text "2" at -53.924,-108.712 h1.78
  text "3" at 9.305,-108.712 h1.78
  text "4" at 72.974,-108.712 h1.78
  text "5" at 136.449,-108.712 h1.78
  text "6" at 200.076,-108.712 h1.78
Drill Drawing:
  text "DOCUMENT NUMBER:" at 192.26,-96.99 h1.15
  text "'.ProjectPCBFabNumber'_FAB-D" at 192.51,-99.99 h1.38
  text ".ProjectPCBFabRevision" at 209.188,-104.562 h1.5
TITLE MIRROR (M17):
  lines w0.1: -143.51,-87.49 -61.69,-87.49 ; -142.39,-104.625 -142.39,-103.355 ; -142.39,-103.99 -132.23,-103.99 ; -142.39,-102.79 -142.39,-101.79 ; -142.39,-102.29 -132.39,-102.29 ; -139.85,-104.625 -139.85,-103.355 ; -137.39,-102.59 -137.39,-101.99 ; -137.31,-104.625 -137.31,-103.355 ; -134.77,-104.625 -134.77,-103.355 ; -132.39,-102.79 -132.39,-101.79 ; -132.23,-104.625 -132.23,-103.355 ; -113.69,-79.99 -113.69,-82.99 -143.51,-82.99 ; -143.51,-82.99 -143.51,-82.99
  lines w0.127: -148.59,-50.165 -143.51,-50.165 ; -148.59,10.16 -143.51,10.16 ; -148.59,70.485 -143.51,70.485 ; -143.51,-100.99 -61.69,-100.99 ; -143.51,-94.99 -61.69,-94.99 ; -143.51,-88.99 -61.69,-88.99 ; -128.19,-105.41 -128.19,-94.99 ; -120.69,-105.41 -120.69,-100.99 ; -107.69,-100.99 -107.69,-94.99 ; -89.69,-105.41 -89.69,-88.99 ; -85.09,-110.49 -85.09,-105.41 ; -85.09,125.73 -85.09,130.81 ; -61.69,-105.41 -61.69,-79.99 ; -21.59,-110.49 -21.59,-105.41 ; -21.59,125.73 -21.59,130.81 ; 41.91,-110.49 41.91,-105.41 ; 41.91,125.73 41.91,130.81 ; 105.41,-110.49 105.41,-105.41 ; 105.41,125.73 105.41,130.81 ; 168.91,-110.49 168.91,-105.41 ; 168.91,125.73 168.91,130.81 ; 227.33,-50.165 232.41,-50.165 ; 227.33,10.16 232.41,10.16 ; 227.33,70.485 232.41,70.485 ; -143.51,-105.41 227.33,-105.41 227.33,125.73 -143.51,125.73 -143.51,-105.41 ; -143.51,-105.41 -27.69,-105.41 -27.69,-79.99 -143.51,-79.99 -143.51,-105.41 ; -148.59,-110.49 232.41,-110.49 232.41,130.81 -148.59,130.81 -148.59,-110.49
  lines w0.254: -143.51,121.23 -22.01,121.23 ; -124.01,116.73 -124.01,121.23 -124.01,125.73 ; -45.51,116.73 -45.51,121.23 -45.51,125.73 ; -33.01,116.73 -33.01,121.23 -33.01,125.73 ; -22.01,121.23 -22.01,125.73 -143.51,125.73 -143.51,116.73 -22.01,116.73 -22.01,121.23
  text "6" at -116.256,127.508 h1.78
  text "5" at -52.629,127.508 h1.78
  text "4" at 10.846,127.508 h1.78
  text "3" at 74.515,127.508 h1.78
  text "2" at 137.744,127.508 h1.78
  text "1" at 201.134,127.508 h1.78
  text "ECO" at -34.51,122.73 h1.52
  text "REV" at -24.51,122.73 h1.52
  text "Date" at -129.01,122.23 h1.52
  text "Comments" at -81.01,122.23 h1.52
  text "A" at -145.415,98.476 h1.78
  text "A" at 230.505,98.476 h1.78
  text "B" at -145.415,38.024 h1.78
  text "B" at 230.505,38.024 h1.78
  text "C" at -145.415,-22.301 h1.78
  text "C" at 230.505,-22.301 h1.78
  text "PART NUMBER:" at -114.69,-81.99 h1
  text "'.ProjectpartNumber'" at -126.69,-82.24 h1.5
  text "D" at -145.415,-82.499 h1.78
  text "TITLE:" at -62.69,-82.49 h1.14
  text "D" at 230.505,-82.499 h1.78
  text "'.ProjectTitle'" at -62.69,-86.49 h2.5
  text "GERBER FILE:" at -90.69,-90.99 h1.15
  text "PCB Layout Contact:" at -62.69,-90.99 h1.15
  text "'.Plot_File_Name'" at -90.69,-93.99 h1.5
  text ".ProjectContactPCB" at -62.69,-93.99 h1.6
  text "M" at -30.69,-95.99 h15.24
  text "DATE:" at -129.39,-96.99 h1.14
  text "PCB NUMBER:" at -90.69,-96.99 h1.15
  text "Project Owner:" at -62.69,-96.99 h1.15
  text "Microchip Technology Inc." at -29.46,-99.25 h1.78
  text "'.PRINT_DATE'" at -129.39,-99.99 h1.5
  text ".ProjectPCBFabNumber" at -90.69,-99.99 h1.6
  text ".ProjectContactOwner" at -62.69,-99.99 h1.6
  text "2355 W. Chandler Blvd." at -30.69,-101.99 h1.78
  text "LAYER NAME:" at -90.69,-102.49 h1.14
  text "10mm" at -128.69,-102.59 h0.7
  text "REV:" at -121.44,-102.74 h1.14
  text "PCB FILE NAME:" at -62.69,-102.74 h1.15
  text "400mil" at -128.59,-104.29 h0.7
  text "Chandler, AZ  85224" at -31.69,-104.49 h1.78
  text "'.PCB_FILE_NAME_NO_PATH'" at -62.69,-104.74 h1
  text "6" at -116.256,-108.712 h1.78
  text "5" at -52.629,-108.712 h1.78
  text "4" at 10.846,-108.712 h1.78
  text "3" at 74.515,-108.712 h1.78
  text "2" at 137.744,-108.712 h1.78
  text "1" at 201.134,-108.712 h1.78
Notes_2:
  lines w0.1: 10.71,18.189 30.011,19.404 ; 11.815,25.954 30.011,19.404 ; 12.78,10.624 30.011,19.404 ; 15.914,32.642 30.011,19.404 ; 22.331,37.152 30.011,19.404 ; 30.011,38.742 30.011,19.404 ; 37.691,37.152 30.011,19.404 ; 44.108,32.642 30.011,19.404 ; 47.242,10.624 30.011,19.404 ; 48.207,25.954 30.011,19.404 ; 49.312,18.189 30.011,19.404

## Text inside footprints (layer, text, board x,y; h text height)
J100: Top Assembly "1" at 9.717,43.48 h0.5
J101: Top Assembly "1" at 9.925,35.9 h0.5
J102: Top Assembly "1" at 50.117,16.02 h0.5
J103: Top Assembly "1" at 50.117,46.02 h0.5
J201: Top Assembly "1" at 9.9,29.5 h0.5
R108: Bottom Assembly "1" at 32.583,14.153 h0.5
SW101: Bottom Assembly "1" at 48.3,63.7 h0.5
SW102: Bottom Assembly "1" at 36.8,63.8 h0.5
SW103: Bottom Assembly "1" at 25.375,63.7 h0.5
SW104: Bottom Assembly "1" at 44.139,5.026 h0.5
SW105: Bottom Assembly "1" at 13.937,63.7 h0.5
SW200: Bottom Assembly "1" at 18.383,5.85 h0.5
U100: Top Assembly "1" at 46.475,29.11 h0.5 r90
U201: Bottom Assembly "1" at 13.175,12.82 h0.5 r90
U204: Bottom Assembly "1" at 12.817,21.136 h0.5 r90